# EAGLE board CT_schematic (EAGLE 7.6.0)

Size 100 x 80 mm. Coordinates in mm from the lower left corner, seen from the top.
Outline: 0,0 100,0 100,80 0,80 0,0
Copper layers (1*16): Top 0.035mm / dielectric 1.5mm / Bottom 0.035mm
Design rules "default": minimum track width 10mil, minimum drill 24mil, track to track 8mil, track to pad 8mil, pad to pad 8mil, via to via 8mil, smd to smd 8mil, copper to edge 40mil, drill to drill 8mil, minimum pad ring 10mil, minimum via ring 8mil, stop-mask expansion 4mil, vias tented up to drill 0mil, thermal gap 10mil

## Footprints (pad centres in the part's own frame; a part is rotated, then mirrored left to right if it is on the bottom)
C0603 = smd 0.8 x 0.8: 1 -0.762,0; 2 0.762,0
C0402 = smd 0.5 x 0.5: 1 -0.508,0; 2 0.508,0
C1210 = smd 1.2 x 2.5: 1 -1.524,0; 2 1.524,0
R0603 = smd 0.8 x 0.8: 1 -0.762,0; 2 0.762,0
EXV-9H = smd 3.505 x 1.676: 1 -2.857,0; 2 2.857,0
L0603 = smd 0.8 x 0.8: 1 -0.762,0; 2 0.762,0
IND25X25CZ = smd 2.489 x 3.429: 1 -2.718,0; 2 2.718,0
PJ-037B_PACKAGE = drill 3.7 square: 1 12,0 | drill 3.2 square: 2 6,0
WLCSP36 = smd 0.229 x 0.229: A1 -1,1; A2 -0.6,1; A3 -0.2,1; A4 0.2,1; A5 0.6,1; A6 1,1; B1 -1,0.6; B2 -0.6,0.6; B3 -0.2,0.6; B4 0.2,0.6; B5 0.6,0.6; B6 1,0.6; C1 -1,0.2; C2 -0.6,0.2; C3 -0.2,0.2; C4 0.2,0.2; C5 0.6,0.2; C6 1,0.2; D1 -1,-0.2; D2 -0.6,-0.2; D3 -0.2,-0.2; D4 0.2,-0.2; D5 0.6,-0.2; D6 1,-0.2; E1 -1,-0.6; E2 -0.6,-0.6; E3 -0.2,-0.6; E4 0.2,-0.6; E5 0.6,-0.6; E6 1,-0.6; F1 -1,-1; F2 -0.6,-1; F3 -0.2,-1; F4 0.2,-1; F5 0.6,-1; F6 1,-1
SOIC-8 = smd 1.6 x 0.6: 1 -2.7,1.905 | smd 1.55 x 0.6: 2 -2.7,0.635; 3 -2.7,-0.635; 4 -2.7,-1.905; 5 2.7,-1.905; 6 2.7,-0.635; 7 2.7,0.635; 8 2.7,1.905
ABLS-25.000MHZ-B2F-T = smd 5.6 x 2.8: 1 -3.81,0; 2 5.69,0
ASEK = smd 1.4 x 1: 1 -1.1,-0.8; 2 1.1,-0.8; 3 1.1,0.8; 4 -1.1,0.8
IR3899MTR1PBF = smd 0.25 x 0.75: 1 0,0; 2 0.5,0; 3 1,0; 4 1.5,0; 5 2,0; 6 2.5,0; 7 3,0 | smd 0.75 x 0.25: 8 3.425,0.78; 9 3.425,1.28; 10 3.425,1.78; 14 -0.425,1.78; 15 -0.425,1.28; 16 -0.425,0.78 | smd 0.3 x 1.95: 11 3.22,3.63 | smd 1.62 x 2.42: 12 1.786,3.8 | smd 1 x 1.95: 13 0.117,3.63 | smd 2.19 x 1.25: 17 1.51,1.26
SON-6 = smd 0.55 x 0.3: 1 -0.355,0.5 | smd 0.52 x 0.3: 2 -0.37,0; 3 -0.37,-0.5; 4 0.37,-0.5; 5 0.37,0; 6 0.37,0.5
SW_4-1437565-2 = smd 1.4 x 2.1: 1 -2.23,4.55; 2 -2.23,-4.55; 3 2.23,4.55; 4 2.23,-4.55
LGM67K-G1J2-24-Z = smd 0.8 x 1.4: A -2,0; C 0,0
NC7SZ125M5X = smd 1.3 x 0.7: 1 -1.3,0.95; 2 -1.3,0; 3 -1.3,-0.95; 4 1.3,-0.95; 5 1.3,0.95
DUMMY_PACKAGE_104 = drill 0.3: 1 0,-1; 2 1.5,-1; 3 3,-1

## Placement (x,y rotation side)
C1  1e-07  [C0603]  -22.86,54.61 0 top  (outside the outline)
C2  1e-07  [C0603]  -26.67,54.61 0 top  (outside the outline)
C3  4.7e-06  [C0603]  -59.69,49.53 0 top  (outside the outline)
C4  1e-08  [C0603]  -30.48,54.61 0 top  (outside the outline)
C5  1e-08  [C0603]  -34.29,54.61 0 top  (outside the outline)
C6  1e-06  [C0603]  -38.1,54.61 0 top  (outside the outline)
C7  1e-11  [C0402]  -34.29,59.69 0 top  (outside the outline)
C8  1e-11  [C0402]  -38.1,59.69 0 top  (outside the outline)
C9  1e-08  [C0402]  -41.91,59.69 0 top  (outside the outline)
C10  1e-08  [C0402]  -45.72,59.69 0 top  (outside the outline)
C11  0.0001  [C1210]  -58.42,36.83 0 top  (outside the outline)
C12  2.2e-06  [C0603]  -15.24,54.61 0 top  (outside the outline)
C13  1e-07  [C0402]  -49.53,59.69 0 top  (outside the outline)
C14  1e-07  [C0402]  -53.34,59.69 0 top  (outside the outline)
C15  7.8444498006919e-09  [R0603]  -33.02,43.18 0 top  (outside the outline)
C16  2.7e-07  [C0603]  -19.05,54.61 0 top  (outside the outline)
C19  1e-07  [C0402]  -57.15,59.69 0 top  (outside the outline)
C20  0.0001  [EXV-9H]  -40.64,29.21 0 top  (outside the outline)
C21  0.0001  [EXV-9H]  -52.07,29.21 0 top  (outside the outline)
C22  1e-08  [C0402]  -15.24,64.77 0 top  (outside the outline)
F1  240.0  [L0603]  -41.91,54.61 0 top  (outside the outline)
I1  6.8e-07  [IND25X25CZ]  -38.1,36.83 0 top  (outside the outline)
J1  PJ-037B  [PJ-037B_PACKAGE]  -27.94,7.62 0 top  (outside the outline)
R1  10000.0  [R0603]  -15.24,49.53 0 top  (outside the outline)
R2  1000.0  [R0603]  -45.72,54.61 0 top  (outside the outline)
R3  910.0  [R0603]  -49.53,54.61 0 top  (outside the outline)
R4  4700.0  [R0603]  -53.34,54.61 0 top  (outside the outline)
R5  2200.0  [R0603]  -57.15,54.61 0 top  (outside the outline)
R6  2200.0  [R0603]  -15.24,59.69 0 top  (outside the outline)
R7  10000.0  [R0603]  -20.32,49.53 0 top  (outside the outline)
R8  10000.0  [R0603]  -25.4,49.53 0 top  (outside the outline)
R9  10000.0  [R0603]  -30.48,49.53 0 top  (outside the outline)
R10  0.1  [R0603]  -19.05,59.69 0 top  (outside the outline)
R11  4030.2416170974  [R0603]  -40.64,43.18 0 top  (outside the outline)
R12  1600.0  [R0603]  -22.86,59.69 0 top  (outside the outline)
R13  64.984347826087  [R0603]  -48.26,43.18 0 top  (outside the outline)
R14  130.0  [R0603]  -26.67,59.69 0 top  (outside the outline)
R15  39000.0  [R0603]  -35.56,49.53 0 top  (outside the outline)
R16  49900.0  [R0603]  -40.64,49.53 0 top  (outside the outline)
R17  5600.0  [R0603]  -30.48,59.69 0 top  (outside the outline)
R18  10000.0  [R0603]  -45.72,49.53 0 top  (outside the outline)
R19  10000.0  [R0603]  -50.8,49.53 0 top  (outside the outline)
R20  82000.0  [R0603]  -55.88,49.53 0 top  (outside the outline)
R21  300000.0  [R0603]  -53.34,43.18 0 top  (outside the outline)
R22  120000.0  [R0603]  -58.42,43.18 0 top  (outside the outline)
U1  stm32f058t8y6  [WLCSP36]  -15.24,43.18 0 top  (outside the outline)
U2  M24M02-DRMN6TP  [SOIC-8]  -40.64,19.05 0 top  (outside the outline)
U3  ABLS-25.000MHZ-B2F-T  [ABLS-25.000MHZ-B2F-T]  -26.67,36.83 0 top  (outside the outline)
U4  ASEK-2-32.768KHz-ECST  [ASEK]  -31.75,29.21 0 top  (outside the outline)
U5  IR3899MTR1PBF  [IR3899MTR1PBF]  -25.4,17.78 0 top  (outside the outline)
U6  TPS3895ADRYR  [SON-6]  -24.13,63.5 0 top  (outside the outline)
U7  4-1437565-2  [SW_4-1437565-2]  -44.45,6.35 0 top  (outside the outline)
U8  Q65110A2395  [LGM67K-G1J2-24-Z]  -46.99,36.83 0 top  (outside the outline)
U9  nc7sz125m5x  [NC7SZ125M5X]  -21.59,43.18 0 top  (outside the outline)
U10  Dummy  [DUMMY_PACKAGE_104]  -21.59,64.77 0 top  (outside the outline)

## Library data of the parts
C1-C16 C19-C22 F1 I1 J1 R1-R22 U1-U10 = circuit_tree

## Nets
CLK_CRYSTAL_U1_B5: C7.1 U1.B5 U3.1
CLK_CRYSTAL_U1_C5: C8.1 U1.C5 U3.2
CLK_U1_B6: U1.B6 U4.3
GND: C1.2 C2.2 C3.2 C4.2 C5.2 C6.2 C7.2 C8.2 C9.2 C10.2 C12.2 C13.2 C14.2 C19.2 C20.2 C21.2 C22.2 J1.2 R2.2 R7.2 R8.2 R9.2 R10.1 R10.2 R12.2 R15.2 R17.2 R20.2 R22.2 U1.D6 U1.F1 U2.4 U4.2 U5.4 U5.11 U5.17 U6.2 U8.C U9.1 U9.3 U10.1
NET_U1_A4: R6.1 U1.A4 U2.5
NET_U1_B4: R7.1 U1.B4
NET_U1_C4: R5.1 U1.C4 U2.6
NET_U1_D5: R4.1 U1.D5 U9.4
NET_U1_E5: C4.1 C5.1 C6.1 F1.1 U1.E5
NET_U1_F2: R8.1 U1.F2
NET_U1_F5: R3.1 U1.F5 U8.A
NET_U1_F6: R1.1 U1.F6 U7.3 U7.4
NET_U2_3: R9.1 U2.3
NET_U5_1: C15.1 R11.1 R12.1 R13.1 R14.1 U5.1 U5.8
NET_U5_2: C14.1 U5.2
NET_U5_3: C15.2 C16.1 C16.2 U5.3
NET_U5_5: R15.1 U5.5
NET_U5_10: C12.1 U5.10
NET_U5_12: C11.1 I1.1 U5.12
NET_U5_13: U5.13
NET_U5_14: C11.2 U5.14
NET_U5_15: R16.1 R17.1 U5.15
NET_U5_ATNET_3: I1.2 R11.2
NET_U5_ATNET_4: C16.2 R13.2
NET_U5_ATNET_5: R14.2
NET_U6_1: R19.1 R20.1 U6.1
NET_U6_3: R21.2 R22.1 U6.3
NET_U6_4: R18.1 U6.4 U9.2
NET_U7_1: R2.1 U7.1 U7.2
PROC_PA12: U1.A1 U10.2
PROC_PA15: U1.A2 U10.3
VCC_S1_16V1: C13.1 C20.1 C21.1 J1.1 R16.2 U5.9
VCC_TIER1_1V8: C1.1 C2.1 C3.1 C9.1 C10.1 C19.1 C22.1 F1.2 I1.2 R1.2 R3.2 R4.2 R5.2 R6.2 R11.2 R18.2 R19.2 R21.1 U1.A5 U1.E1 U2.8 U4.4 U6.6 U9.5

## Tracks (layer width: path | path; a pad name or v marks a point on that pad's centre or on a via)
CLK_CRYSTAL_U1_B5  (2 unrouted)
CLK_CRYSTAL_U1_C5  (2 unrouted)
CLK_U1_B6  (1 unrouted)
GND  (40 unrouted)
NET_U1_A4  (2 unrouted)
NET_U1_B4  (1 unrouted)
NET_U1_C4  (2 unrouted)
NET_U1_D5  (2 unrouted)
NET_U1_E5  (4 unrouted)
NET_U1_F2  (1 unrouted)
NET_U1_F5  (2 unrouted)
NET_U1_F6  (3 unrouted)
NET_U2_3  (1 unrouted)
NET_U5_1  (6 unrouted)
NET_U5_2  (1 unrouted)
NET_U5_3  (3 unrouted)
NET_U5_5  (1 unrouted)
NET_U5_10  (1 unrouted)
NET_U5_12  (2 unrouted)
NET_U5_14  (1 unrouted)
NET_U5_15  (2 unrouted)
NET_U5_ATNET_3  (1 unrouted)
NET_U5_ATNET_4  (1 unrouted)
NET_U6_1  (2 unrouted)
NET_U6_3  (2 unrouted)
NET_U6_4  (2 unrouted)
NET_U7_1  (2 unrouted)
PROC_PA12  (1 unrouted)
PROC_PA15  (1 unrouted)
VCC_S1_16V1  (5 unrouted)
VCC_TIER1_1V8  (23 unrouted)